# Altium PCB PCB.PcbDoc
Units mil, origin at the board's own origin, x right, y up, seen from the top; angles counter-clockwise.
Board outline 1958.53 x 3555.03 mil, 2 copper layers (Top Layer, Bottom Layer); 49 components, 42 nets, 171 pads, 28 vias.
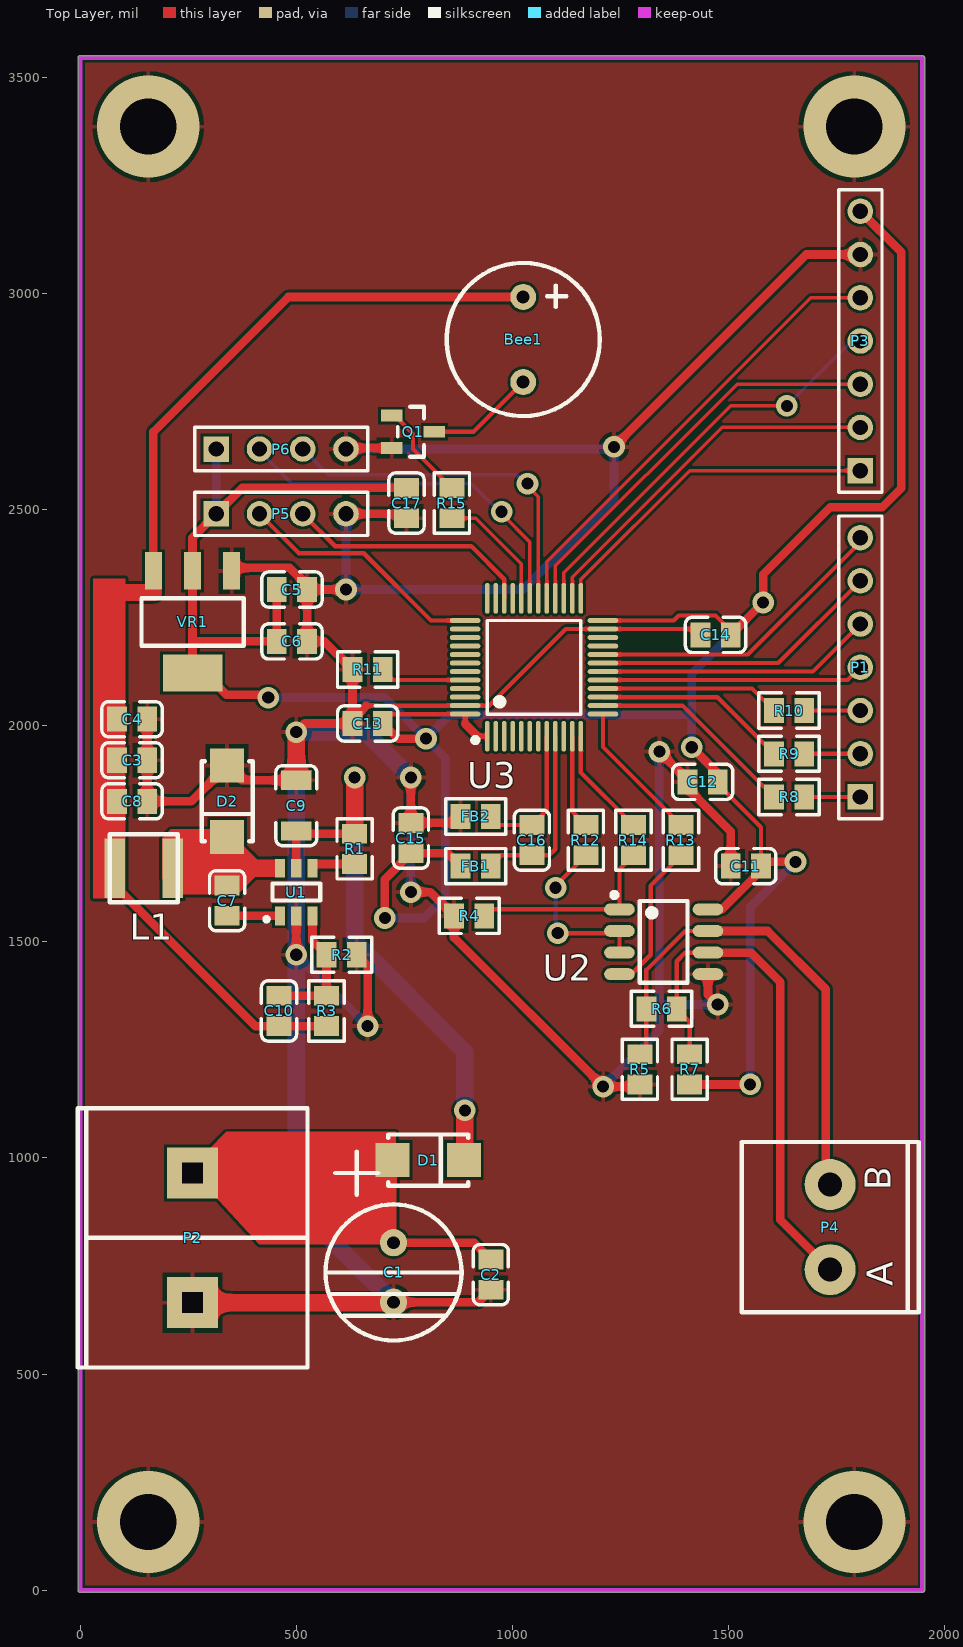
[diagram p0: Top Layer view]
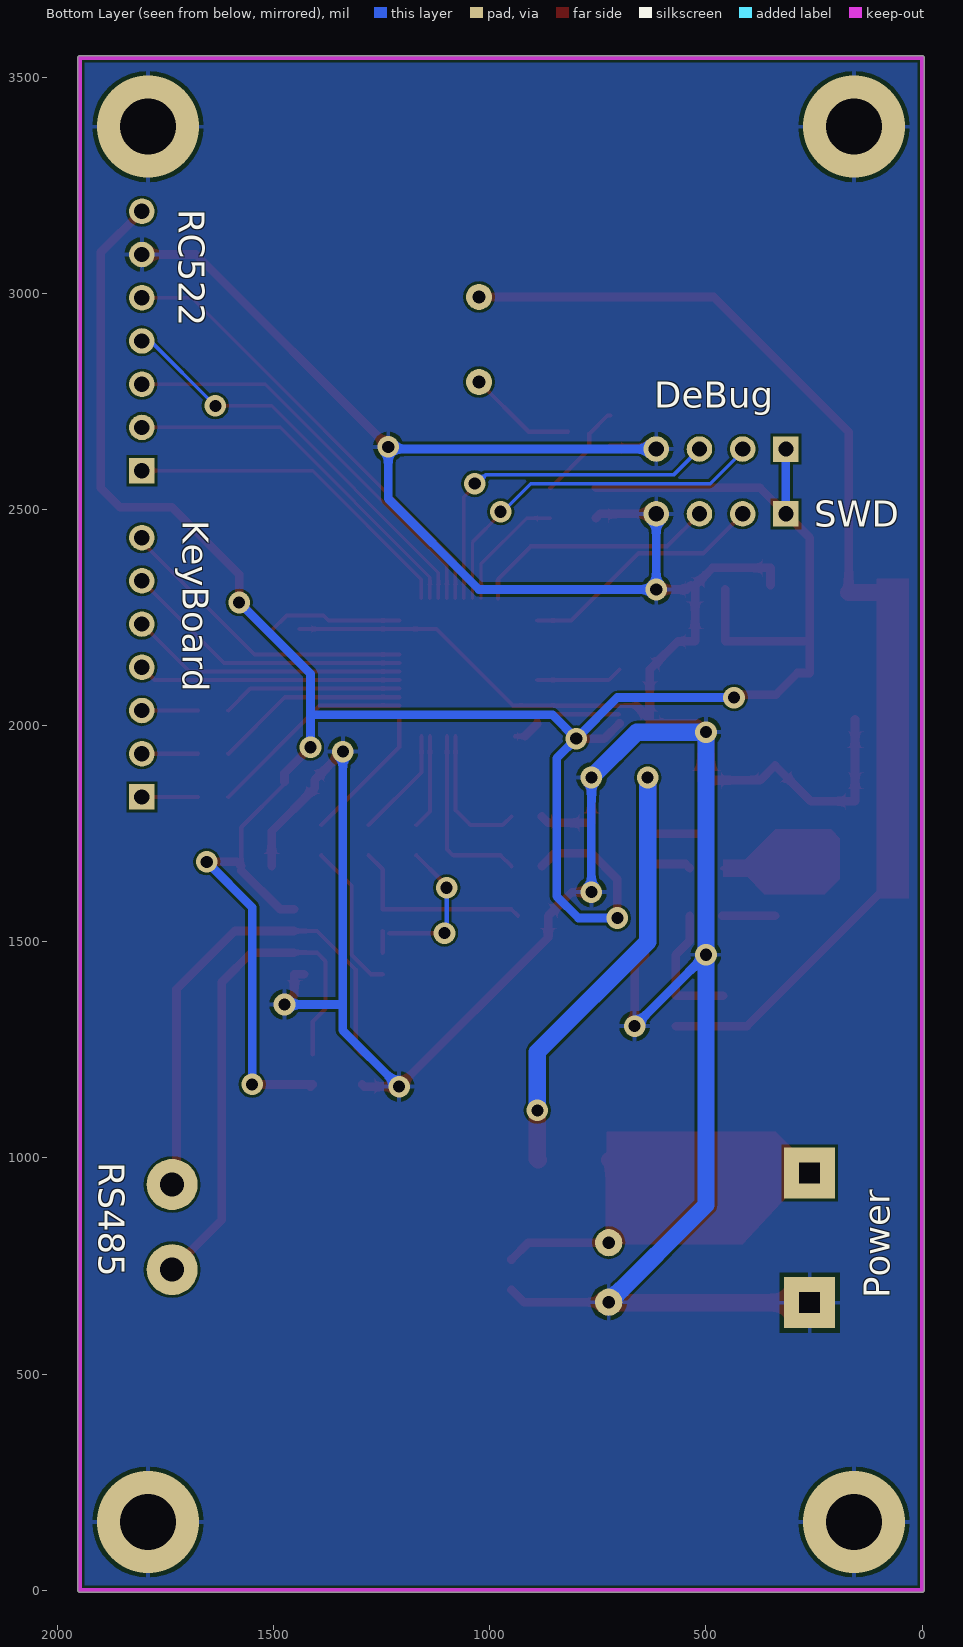
[diagram p1: Bottom Layer view, seen from below]
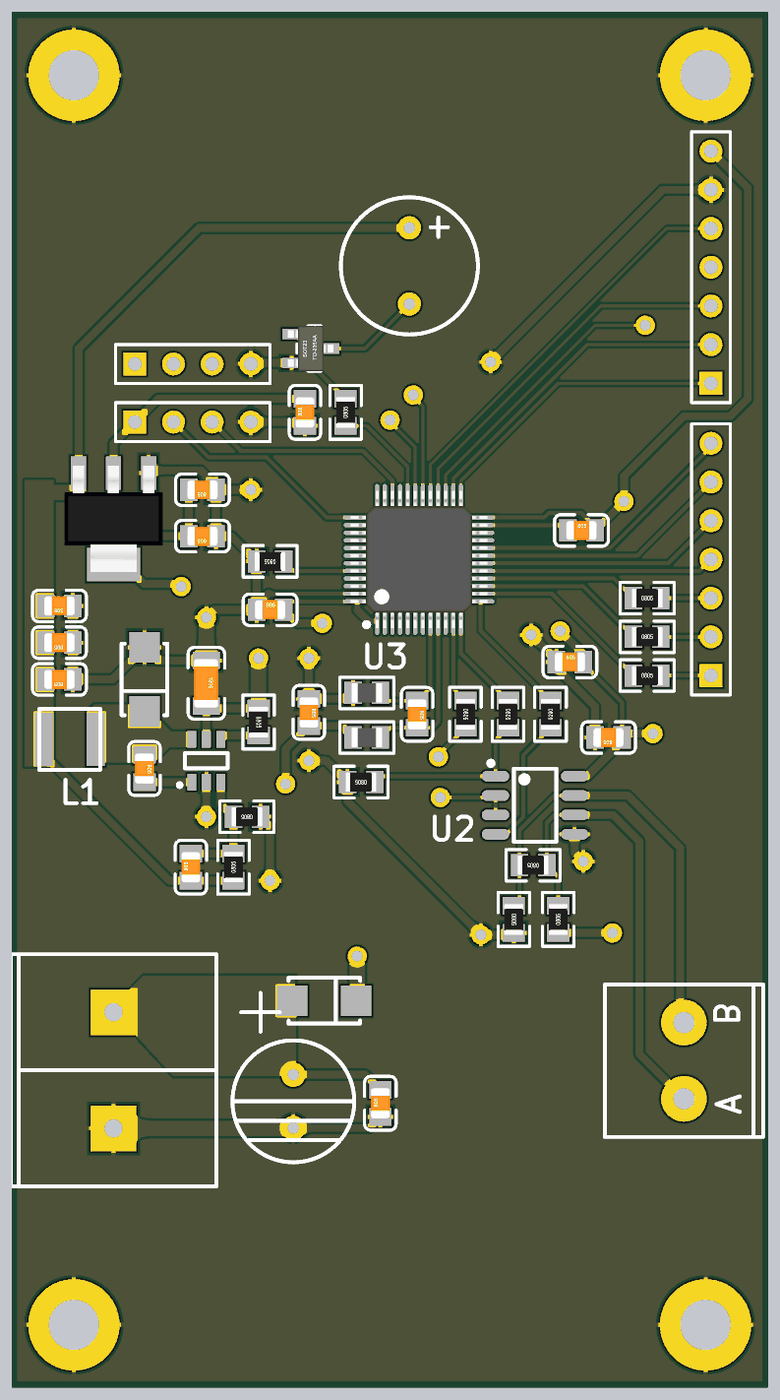
[diagram p2: 3D render of the assembled board from above, using the file's embedded part models]

## Layer stack, top to bottom
Top Solder: solder mask 0.4, Solder Resist, Dk 3.5
Top Layer: signal copper 1.4
Dielectric 1: dielectric 12.6, FR-4, Dk 4.8
Bottom Layer: signal copper 1.4
Bottom Solder: solder mask 0.4, Solder Resist, Dk 3.5

## Board outline
-5.01,0 ccw(c0,0) 0,-5.02 1948.5,-5.02 ccw(c1948.5,0) 1953.52,0 1953.52,3545 ccw(c1948.5,3545) 1948.5,3550.02 0,3550.02 ccw(c0,3545) -5.01,3545

## Design rules (kind name [scope] priority, off if disabled: settings)
Clearance [All] p1: gap=6
PolygonConnect [All] p1: connectstyle=Relief reliefconductorwidth=10 reliefentries=4 polygonreliefangle="90 Angle" airgapwidth=10
RoutingVias [All] p1: holewidth=28 width=50 viastyle="Through Hole" minholewidth=28 minwidth=50 maxholewidth=28 maxwidth=50
SolderMaskExpansion [All] p1: expansion=4
Width [All] p1: maxlimit=40 minlimit=6 preferedwidth=8
30 further rules are at their usual default settings.

## Classes and differential pairs
component class Designator: C1 C2 C3 C4 C5 C6 C7 C8 C9 C10 D1 D2 L1 P2 R1 R3 U1 VR1
component class Sheet1: Bee1 C12 C13 C14 C15 C16 C17 FB1 FB2 P5 P6 Q1 R7 R8 R9 R11 R12 R13 R14 R15 U3

## Components (designator, comment, footprint, x,y, rotation, side; value= is the part's Value field where it differs from the comment)
Bee1 "Speaker" BEE 1025,2893.43 r0 top
C1 "CAP" 8X12_CAP 725,735 r270 top
C2 "10uF (106) 10% 25V" 0805_C 950,730 r90 top
C3 "10uF (106) 10% 25V" 0805_C 120,1920 r180 top
C4 "100nF(104) 10% 50V" 0805_C 120,2015 r180 top
C5 "100nF(104) 10% 50V" 0805_C 490,2315 r180 top
C6 "10uF (106) 10% 25V" 0805_C 490,2195 r180 top
C7 "100nF(104) 10% 50V" 0805_C 340,1595 r270 top
C8 "10uF (106) 10% 25V" 0805_C 120,1825 r180 top
C9 "4.7uF (475) 10% 50V" 1206_C 500,1815 r270 top
C10 "33pF (330) 5% 50V" 0805_C 460,1340 r90 top
C11 "100nF(104) 10% 50V" 0805_C 1540,1675 r180 top
C12 "100nF(104) 10% 50V" 0805_C 1440,1870 r0 top
C13 "100nF(104) 10% 50V" 0805_C 665,2005 r0 top
C14 "100nF(104) 10% 50V" 0805_C 1470,2210 r0 top
C15 "100nF(104) 10% 50V" 0805_C 765,1740 r270 top
C16 "100nF(104) 10% 50V" 0805_C 1045,1735 r270 top
C17 "100nF(104) 10% 50V" 0805_C 755,2515 r90 top
D1 "SS54" SMA(DO-214AC)_S1 805,995 r180 top
D2 "SS210" SMA(DO-214AC)_S1 340,1825 r90 top
FB1 "100Ω ±25% 100MHz" 0805_L 915,1675 r0 top
FB2 "100Ω ±25% 100MHz" 0805_L 915,1790 r0 top
L1 "3.3uH" L_4030 225.67,1748.74 r180 top
P1 "Header 7" HDR1X7 1805,1835 r90 top
P2 "Header 2" WJ25 -5.75,1115 r270 top
P3 "Header 7" HDR1X7 1805,2590 r90 top
P4 "Header 2" KF128-2P 1735,840 r0 top
P5 "SWD" HDR1X4 315,2490 r0 top
P6 "Debug" HDR1X4 315,2640 r0 top
Q1 "SS8050 Y1" SOT-23(SOT-23-3) 770,2680 r180 top
R1 "100KΩ (1003) ±1%" 0805_R 635,1715 r270 top
R2 "23.7KΩ (1001) ±1%" 0805_R 605,1470 r180 top
R3 "124KΩ (1003) ±1%" 0805_R 570,1340 r90 top
R4 "10KΩ (1002) ±1%" 0805_R 900,1560 r180 top
R5 "10KΩ (1002) ±1%" 0805_R 1295,1205 r270 top
R6 "120Ω (1200) ±1%" 0805_R 1345,1345 r180 top
R7 "10KΩ (1002) ±1%" 0805_R 1410,1205 r90 top
R8 "1KΩ (1001) ±1%" 0805_R 1640,1835 r0 top
R9 "1KΩ (1001) ±1%" 0805_R 1640,1935 r0 top
R10 "1KΩ (1001) ±1%" 0805_R 1640,2035 r0 top
R11 "10KΩ (1002) ±1%" 0805_R 665,2130 r180 top
R12 "100Ω (1000) ±1%" 0805_R 1170,1735 r270 top
R13 "100Ω (1000) ±1%" 0805_R 1390,1735 r270 top
R14 "100Ω (1000) ±1%" 0805_R 1280,1735 r270 top
R15 "1KΩ (1001) ±1%" 0805_R 860,2515 r90 top
U1 "MP2451DT-LF-Z" SOT-23-6 500,1615 r270 top
U2 "SP3485EN-L/TR" SOIC-8_150mil 1350,1500 r270 top
U3 "STM32F030C8T6" LQFP-48_7x7x05P 1050,2135 r0 top
VR1 "AMS1117-3.3" SOT-223 260,2240 r90 top

## Footprints (in the part's own frame and the unit in brackets; to place one, negate y for a bottom-side part, rotate by r counter-clockwise, add the part's x,y. Pads: shape width x height; smd on the part's side, far side on the other; paste and mask are expansions set on the pad)
8X12_CAP [mm]
  round 1.6 hole 0.75: 1(-1.75,0) 2(1.75,0)
  silkscreen extent -4,-4 4,4
0805_C [mm]
  rect 1.16x1.47 smd: 1(-0.89,0) 2(0.89,0)
  silkscreen extent -1.77,-1.04 1.77,1.04, body extent -1,-0.62 1,0.63, height 0.77
0805_L [mm]
  rect 1.16x1.47 smd: 1(-0.89,0) 2(0.89,0)
  silkscreen extent -1.77,-1.04 1.77,1.03, body extent -1.02,-0.64 1.03,0.64, height 0.6
0805_R [mm]
  rect 1.16x1.47 smd: 1(-0.89,0) 2(0.89,0)
  silkscreen extent -1.77,-1.04 1.77,1.03, body extent -1,-0.62 1,0.63, height 0.49
1206_C [mm]
  rect 1.13x1.8 smd: 1(-1.49,0) 2(1.49,0)
  silkscreen extent -2.36,-1.2 2.35,1.2, body extent -1.6,-0.81 1.6,0.79, height 1
BEE [mil]
  round 60 hole 30: 1(0,98.43) 2(0,-98.43)
  silkscreen extent -177,-177 177,177
HDR1X4 [mm] "Connector; Header; 4 Position"
  rect 1.5x1.5 hole 0.9: 1(0,0)
  round 1.5 hole 0.9: 2(2.54,0) 3(5.08,0) 4(7.62,0)
  silkscreen extent -1.27,-1.27 8.89,1.27
HDR1X7 [mm] "Connector; Header; 7 Position"
  rect 1.5x1.5 hole 0.9: 1(0,0)
  round 1.5 hole 0.9: 2(2.54,0) 3(5.08,0) 4(7.62,0) 5(10.16,0) 6(12.7,0) 7(15.24,0)
  silkscreen extent -1.27,-1.27 16.51,1.27
KF128-2P [mm]
  round 3 hole 1.4: 1(0,2.5) 2(0,-2.5)
  silkscreen extent -5.2,-5 5.2,5
L_4030 [mm]
  rect 1.2x3.5 smd: 1(0.3,2) 2(3.7,2)
  silkscreen extent 0,0 4,4
LQFP-48_7x7x05P [mm]
  oval 0.28x1.8 smd mask+0.051: 1(-2.75,-4.05) 2(-2.25,-4.05) 3(-1.75,-4.05) 4(-1.25,-4.05) 5(-0.75,-4.05) 6(-0.25,-4.05) 7(0.25,-4.05) 8(0.75,-4.05) 9(1.25,-4.05) 10(1.75,-4.05) 11(2.25,-4.05) 12(2.75,-4.05) 25(2.75,4.05) 26(2.25,4.05) 27(1.75,4.05) 28(1.25,4.05) 29(0.75,4.05) 30(0.25,4.05) 31(-0.25,4.05) 32(-0.75,4.05) 33(-1.25,4.05) 34(-1.75,4.05) 35(-2.25,4.05) 36(-2.75,4.05)
  oval 1.8x0.28 smd mask+0.051: 13(4.05,-2.75) 14(4.05,-2.25) 15(4.05,-1.75) 16(4.05,-1.25) 17(4.05,-0.75) 18(4.05,-0.25) 19(4.05,0.25) 20(4.05,0.75) 21(4.05,1.25) 22(4.05,1.75) 23(4.05,2.25) 24(4.05,2.75) 37(-4.05,2.75) 38(-4.05,2.25) 39(-4.05,1.75) 40(-4.05,1.25) 41(-4.05,0.75) 42(-4.05,0.25) 43(-4.05,-0.25) 44(-4.05,-0.75) 45(-4.05,-1.25) 46(-4.05,-1.75) 47(-4.05,-2.25) 48(-4.05,-2.75)
  silkscreen extent -3.6,-4.42 2.75,2.75, body extent -4.5,-4.5 4.5,4.5, height 1.6
SMA(DO-214AC)_S1 [mm]
  rect 2x2 smd: 1(2.1,0) 2(-2.1,0)
  silkscreen extent -2.35,-1.5 2.35,1.5
SOIC-8_150mil [mm]
  oval 0.7x1.8 smd: 1(-1.905,-2.6) 2(-0.635,-2.6) 3(0.635,-2.6) 4(1.905,-2.6) 5(1.905,2.6) 6(0.635,2.6) 7(-0.635,2.6) 8(-1.905,2.6)
  silkscreen extent -2.9,-3.05 2.4,1.4
SOT-23(SOT-23-3) [mm]
  rect 1.25x0.7 smd: 1(1.25,-0.95) 2(1.25,0.95) 3(-1.25,0)
  silkscreen extent -0.65,-1.46 0.9,1.46, body extent -1.5,-1.5 1.5,1.5, height 1.3
SOT-23-6 [mm]
  rect 1.1x0.6 smd: 1(1.4,-0.95) 2(1.4,0) 3(1.4,0.95) 4(-1.4,0.95) 5(-1.4,0) 6(-1.4,-0.95)
  silkscreen extent -0.5,-1.87 1.72,1.4
SOT-223 [mm]
  rect 2.2x1 smd: 1(3,-2.3) 2(3,0) 3(3,2.3)
  rect 2.2x3.5 smd: 2(-3,0)
  silkscreen extent -1.4,-3 1.4,3, body extent -3.49,-3.24 3.49,3.24, height 1.64
WJ25 [mm]
  rect 3x3 hole 1.2 square: 1(3.81,6.75) 2(11.43,6.75)
  silkscreen extent 0,0 15.24,13.5

## Part data
Bee1: "Loudspeaker"
C2 C3 C6 C8: library part "0805 10uF (106) 10% 25V", "贴片电容"
C4 C5 C7 C11 C12 C13 C14 C15 C16 C17: library part "0805 100nF(104) 10% 50V", "贴片电容"
C9: library part "1206 4.7uF (475) 10% 50V", "贴片电容"
C10: library part "0805 33pF (330) 5% 50V", "贴片电容"
D1: library part "SMA(DO-214AC) SS54", "二极管"
D2: library part "SMA(DO-214AC) SS210", "二极管"
FB1 FB2: library part "0805 100Ω 25% 100MHz", "贴片磁珠"
L1: library part 33uH
P1 P3: "Header, 7-Pin"
P2 P4: "Header, 2-Pin"
P5 P6: library part "Header 4", "Header, 4-Pin"
Q1: library part "SOT-23 SS8050 Y1", "三极管"
R1 R3: library part "0805 100KΩ (1003) 1%", "贴片电阻"
R2 R8 R9 R10 R15: library part "0805 1KΩ (1001) 1%", "贴片电阻"
R4 R5 R7 R11: library part "0805 10KΩ (1002) 1%", "贴片电阻"
R6: library part "0805 120Ω (1200) 1%", "贴片电阻"
R12 R13 R14: library part "0805 100Ω (1000) 1%", "贴片电阻"
U1: library part MP2451DT-LF-Z_[C14123], "DC-DCоƬ"
U2: library part SP3485EN-L/TR_[C8963], "RS-485/RS-422"
U3: "ARM"
VR1: library part "SOT-223 AMS1117-3.3", "低压差线性稳压(LDO)"

## Via types
v1: diameter 50, hole 28, Top Layer to Bottom Layer, 24 vias
v2: diameter 236.22, hole 129.92, Top Layer to Bottom Layer, 4 vias

## Nets (pads, with @x,y where several pads share a name; then routed paths per layer and width w, separated by ;. In a path a pad name is that pad's centre, name@x,y a point inside that pad or via, vN(x,y) a via of type N, cw(c..) or ccw(c..) an arc to the next point about the centre after c; other vN are vias at no path point)
BEE: R15.1 U3.32 | length 284.2
  Top Layer w8: R15.1 915.04,2479.96 1020.47,2374.53 U3.32
GND: C1.2 C2.1 C3.1 C4.1 C5.1 C6.1 C8.1 C9.1 C11.2 C12.1 C13.1 C14.1 C15.1 C17.1 D2.1 FB2.1 P2.2 P3.6 P5.4 P6.4 Q1.2 R2.1 R4.2 R5.2 R11.2 U1.2 U2.5 U3.23 U3.47 VR1.1 | length 10625.7
  Top Layer w10: 661.42,2046.42 U3.47 946.42,2046.42 1123.58,2223.58 U3.23 C14.1@1440,2223.58
  Top Layer w20: C4.1 C3.1 C8.1 257.32,1825 D2.1 374.02,1873.66 C9.1 ; VR1.1@350.55,2325.55 VR1.1 350.55,2365 485,2365 525.04,2324.96 C5.1 ; v1(500,1470) U1.2 ; v1(500,1985) 520,2005 C13.1 ; v1(615,2315) 545.04,2315 535.04,2325 C5.1 ; P5.4 744.96,2490 C17.1 ; P6.4 617.6,2642.6 Q1.2 ; R2.1 665,1445.04 v1(665,1305) ; 661.42,2046.42 629.96,2014.96 R11.2 564.96,2195 C6.1 C5.1 ; C1.2@723.9,665 C1.2 921.14,666.1 C2.1 ; v1(765,1615) 809.96,1615 R4.2 864.96,1510.04 v1(1210,1165) 1290.04,1165 R5.2 ; v1(765,1880) C15.1 865,1775.04 FB2.1 ; v1(1235,2645) 1680,3090 P3.6 ; v1(1340,1940) 1404.96,1875.04 C12.1 1404.96,1855.04 1504.96,1755.04 C11.2 ; U2.5@1430,1425 U2.5 1452.36,1377.64 v1(1475,1355)
  Top Layer w40: P2.2 C1.2@723.9,665 ; C9.1 v1(500,1985)
  Bottom Layer w20: v1(500,1470) v1(665,1305) ; P5.4 v1(615,2315) 1025,2315 1235,2525 v1(1235,2645) 1230,2640 P6.4 ; v1(765,1615) v1(765,1880) ; v1(1210,1165) 1340,1295 1340,1360 ; v1(1340,1940) 1340,1360 ; v1(1475,1355) 1345,1355 1340,1360
  Bottom Layer w40: C1.2 500,891.1 v1(500,1470) v1(500,1985) 660,1985 v1(765,1880)
  other v2: 157.48,157.48 1791.02,157.48 157.48,3385.83 1791.02,3385.83
GNDA: C16.1 FB2.2 U3.8 | length 323
  Top Layer w10: FB2.2 970,1770.04 C16.1 1079.53,1804.57 U3.8
KEY_X1: R8.1 U3.14 | length 483.1
  Top Layer w10: U3.14 1393.58,2046.42 R8.1
KEY_X2: R9.1 U3.15 | length 449.8
  Top Layer w10: U3.15 1473.86,2066.1 R9.1
KEY_X3: R10.1 U3.16 | length 416.5
  Top Layer w10: U3.16 1554.17,2085.79 R10.1
KEY_Y1: P1.4 U3.17 | length 607.8
  Top Layer w10: U3.17 1775.47,2105.47 P1.4
KEY_Y2: P1.5 U3.18 | length 641
  Top Layer w10: U3.18 1695.16,2125.16 P1.5
KEY_Y3: P1.6 U3.19 | length 674.3
  Top Layer w10: U3.19 1614.84,2144.84 P1.6
KEY_Y4: P1.7 U3.20 | length 713.4
  Top Layer w10: U3.20 1544.53,2164.53 1805,2425 P1.7
MATRIX_X1: P1.1 R8.2 | length 130
  Top Layer w10: R8.2 P1.1
MATRIX_X2: P1.2 R9.2 | length 130
  Top Layer w10: R9.2 P1.2
MATRIX_X3: P1.3 R10.2 | length 130
  Top Layer w10: R10.2 P1.3
NetBee1_2: Bee1.2 Q1.3 | length 253.4
  Top Layer w10: Q1.3 910,2680 Bee1.2
NetC1_1: C1.1 C2.2 D1.1 P2.1 | length 908.1
  Top Layer w20: D1.1 722.32,806.57 C1.1 911.14,803.9 C2.2
  Top Layer w40: P2.1 290,995 D1.1
NetC7_1: C7.1 D2.2 L1.1 U1.6 | length 463.7
  Top Layer w10: D2.2 242.32,1742.32 213.86,1713.86 L1.1 253.82,1630.04 C7.1 380.08,1670.12 U1.6
NetC7_2: C7.2 U1.1 | length 122.6
  Top Layer w10: C7.2 C7.2@340.08,1559.88
  Top Layer w20: C7.2@340.08,1559.88 U1.1
NetC10_2: C10.2 R2.2 R3.2 U1.3 | length 308.3
  Top Layer w20: C10.2 R3.2 R2.2 R2.2 537.4,1502.56 U1.3
NetP4_1: P4.1 R5.1 R6.2 U2.7 | length 1165.1
  Top Layer w10: R5.1 1309.96,1255 R6.2 1309.96,1434.96 1400,1525 U2.7 ; P4.1@1725,948.43 P4.1
  Top Layer w20: U2.7 1590,1525 1725,1390 P4.1@1725,948.43
NetP4_2: P4.2 R6.1 R7.2 U2.6 | length 1216.6
  Top Layer w10: R7.2 1410,1315.04 R6.1 1380.04,1455.04 1400,1475 U2.6
  Top Layer w20: U2.6 1551.57,1475 1620,1406.57 1620,856.57 P4.2
NetQ1_1: Q1.1 R15.2 | length 229
  Top Layer w10: Q1.1 727.6,2717.4 770,2675 770,2640.04 R15.2
NetR1_2: R1.2 U1.4 | length 101.7
  Top Layer w20: U1.4 547.24,1679.96 R1.2
NetR11_1: R11.1 U3.44 | length 200.7
  Top Layer w10: R11.1 724.57,2105.47 U3.44
RC522_MISO: P3.4 U3.27 | length 972.6
  Top Layer w8: U3.27 1118.9,2353.9 1505,2740 v1(1635,2740)
  Bottom Layer w8: v1(1635,2740) 1785,2890 P3.4 P3.4@1810,2890
RC522_MOSI: P3.3 U3.28 | length 959.8
  Top Layer w8: U3.28 1099.53,2294.76 1099.53,2369.53 1520,2790 P3.3 P3.3@1810,2790
RC522_NSS: P3.1 U3.25 | length 799.8
  Top Layer w8: U3.25 1158.27,2338.27 1410,2590 P3.1 P3.1@1810,2590
RC522_RST: P3.5 U3.29 | length 1068.4
  Top Layer w8: U3.29 1079.53,2355 1079.53,2379.53 1690,2990 P3.5 P3.5@1810,2990
RC522_SCK: P3.2 U3.26 | length 864
  Top Layer w8: U3.26 1138.58,2343.58 1485,2690 P3.2 P3.2@1810,2690
RS485_DE: R12.2 U2.2 U2.3 | length 392.9
  Top Layer w10: v1(1100,1625) 1100,1629.92 1110,1639.92 v1@1109.96,1639.96 ; v1(1105,1520) U2.2@1232.64,1520 ; v1@1110,1639.96 R12.2 ; U2.3 U2.2
  Bottom Layer w10: v1(1100,1625) 1100,1535 1110,1525 v1(1105,1520)
RS485_RXD: R4.1 R14.2 U2.1 | length 457.2
  Top Layer w10: R4.1 950.04,1575 U2.1 1247.64,1667.6 R14.2
RS485_TXD: R13.2 U2.4 | length 350
  Top Layer w10: U2.4 1275,1425 1320,1470 1320,1629.96 R13.2
SWDCLK: P5.2 U3.37 | length 577.8
  Top Layer w10: P5.2 506,2399 656,2399 811.73,2243.27 U3.37
SWDIO: P5.3 U3.34 | length 573.1
  Top Layer w10: P5.3 590,2415 905,2415 981.1,2338.9 U3.34
UART1_RXD: P6.2 U3.31 | length 857.6
  Top Layer w8: v1(975,2495) 975,2490 1040.16,2424.84 U3.31
  Bottom Layer w8: P6.2 415,2635 490,2560 905,2560 975,2490 v1(975,2495)
UART1_TXD: P6.3 U3.30 | length 829
  Top Layer w8: v1(1035,2560) 1035,2554.69 1059.84,2529.84 U3.30
  Bottom Layer w8: P6.3 575,2580 1010,2580 1030,2560 v1(1035,2560)
UART2_DE: R12.1 U3.11 | length 218.5
  Top Layer w10: U3.11 1138.58,1801.46 R12.1
UART2_RXD: R13.1 U3.13 | length 331.5
  Top Layer w10: U3.13 1209.45,1950.59 R13.1
UART2_TXD: R14.1 U3.12 | length 255.9
  Top Layer w10: U3.12 1158.27,1891.77 R14.1
V3.3: C5.2 C6.2 C11.1 C12.2 C13.2 C14.2 C15.2 C17.2 FB1.1 P3.7 P5.1 P6.1 R7.1 U2.8 U3.1 U3.24 U3.48 VR1.2 | length 7069.1
  Top Layer w10: C13.2@701.77,2026.73 U3.48 890.55,2004.45 ; 919.45,1975.55 U3.1 ; U3.24 1373.27,2243.27 1385,2255 1470,2255 C14.2@1505.04,2219.96 ; C12.2 1475.04,1864.96 1575.04,1764.96 C11.1 C11.1@1575.04,1665.04
  Top Layer w20: v1(435,2065) 428.11,2071.89 338.11,2071.89 288.11,2121.89 260,2121.89 260,2195 ; C5.2 C6.2 260,2195 ; C13.2 735.04,1970 v1(800,1970) ; v1(705,1555) 705,1644.96 C15.2 850,1704.96 FB1.1 ; C17.2 375.04,2550.04 P5.1 260,2435 260,2358.11 260,2195 ; 890.55,2004.45 919.45,1975.55 ; R7.1 R7.1@1410.08,1169.96 ; R7.1 R7.1@1410.08,1169.96 ; v1(1415,1950) 1475.04,1889.96 C12.2 ; R7.1@1415.04,1165 R7.1@1410.08,1169.96 ; U2.8 1485,1575 C11.1@1575.04,1665.04 ; C14.2 v1(1580,2285) ; v1(1550,1170) v1(1550,1170) R7.1@1410.08,1169.96 ; C11.1 1585.04,1685 v1(1655,1685) ; v1(1580,2285) 1580,2350 1735,2505 1855,2505 1900,2550 1900,3095 P3.7
  Bottom Layer w20: P5.1 P6.1 ; v1(435,2065) 705,2065 v1(800,1970) ; v1(705,1555) 795,1555 845,1605 845,1925 v1(800,1970) ; v1(1415,1950) 1415,2025 ; v1(1550,1170) 1550,1580 v1(1655,1685) ; v1(1580,2285) 1415,2120 1415,2025 ; v1(800,1970) 855,2025 1415,2025
V3.3A: C16.2 FB1.2 U3.9 | length 426.8
  Top Layer w10: FB1.2 975,1699.96 C16.2 1084.96,1699.96 1099.21,1714.21 U3.9
V5.0: Bee1.1 C3.2 C4.2 C8.2 C10.1 L1.2 R3.1 VR1.3 | length 2745.6
  Top Layer w20: 84.96,2308.11 C4.2 C3.2 C8.2 80,1820.04 L1.2 80,1630 405.04,1304.96 C10.1 R3.1 ; 169.45,2308.11 VR1.3 169.45,2679.45 481.85,2991.85 Bee1.1
  Top Layer w40: 84.96,2308.11 169.45,2308.11
V12: C9.2 D1.2 R1.1 U1.5 | length 1345.4
  Top Layer w20: U1.5 C9.2 506.3,1750.04 R1.1
  Top Layer w40: R1.1 v1(635,1880) ; D1.2 890,997.32 v1(890,1110)
  Bottom Layer w40: v1(635,1880) 635,1500 890,1245 v1(890,1110)
pads on no net: U3.2 U3.3 U3.4 U3.5 U3.6 U3.7 U3.10 U3.21 U3.22 U3.33 U3.35 U3.36 U3.38 U3.39 U3.40 U3.41 U3.42 U3.43 U3.45 U3.46

## Polygon pours and split planes (outlines as drawn)
GND on Bottom Layer "GND_L02_P010" (solid, remove dead copper, pour order 10): 1948.5,0 1948.5,3545 -20,3545 -20,0
GND on Top Layer "GND_L01_P012" (solid, remove dead copper, pour order 12): 1948.5,0 1948.5,3540 1948.5,3545 -20,3545 -20,0

## Keep-outs
Keep-Out Layer:
  lines w10: 0,0 1948.5,0 1948.5,3545 0,3545 0,0

## Other copper
Top Layer:
  region net V5.0: 105,2340 30,2340 30,1600 105,1600
  region net NetC1_1: 295,1017.02 295,930 414.53,800 730,800 730,1060 337.98,1060
  region net NetC7_1: 365,1610 405,1650 460,1650 460,1690 410,1690 340,1760 210,1760 190,1740 190,1645 225,1610

## Silkscreen, mask and mechanical layers (free items; w line width, h text height)
Top Overlay:
  lines w10: 590,965 690,965 ; 640,915 640,1015
Bottom Overlay:
  text "RC522" at 1720,3195 h60 r90
  text "DeBug" at 620,2735 h60
  text "KeyBoard" at 1710,2475 h60 r90
  text "SWD" at 250,2460 h60
  text "RS485" at 1905,990 h60 r90
  text "Power" at 75,675 h60 r270

## Text inside footprints (layer, text, board x,y; h text height)
P4: Top Overlay "B" at 1815,925 h60 r270; Top Overlay "A" at 1880,760 h60 r90